# Altium PCB ECE315-S26.PcbDoc
Units mm, origin at the board's own origin, x right, y up, seen from the top; angles counter-clockwise.
Board outline 95 x 95 mm, 2 copper layers (Top Layer, Bottom Layer); 47 components, 34 nets, 155 pads, 112 vias.
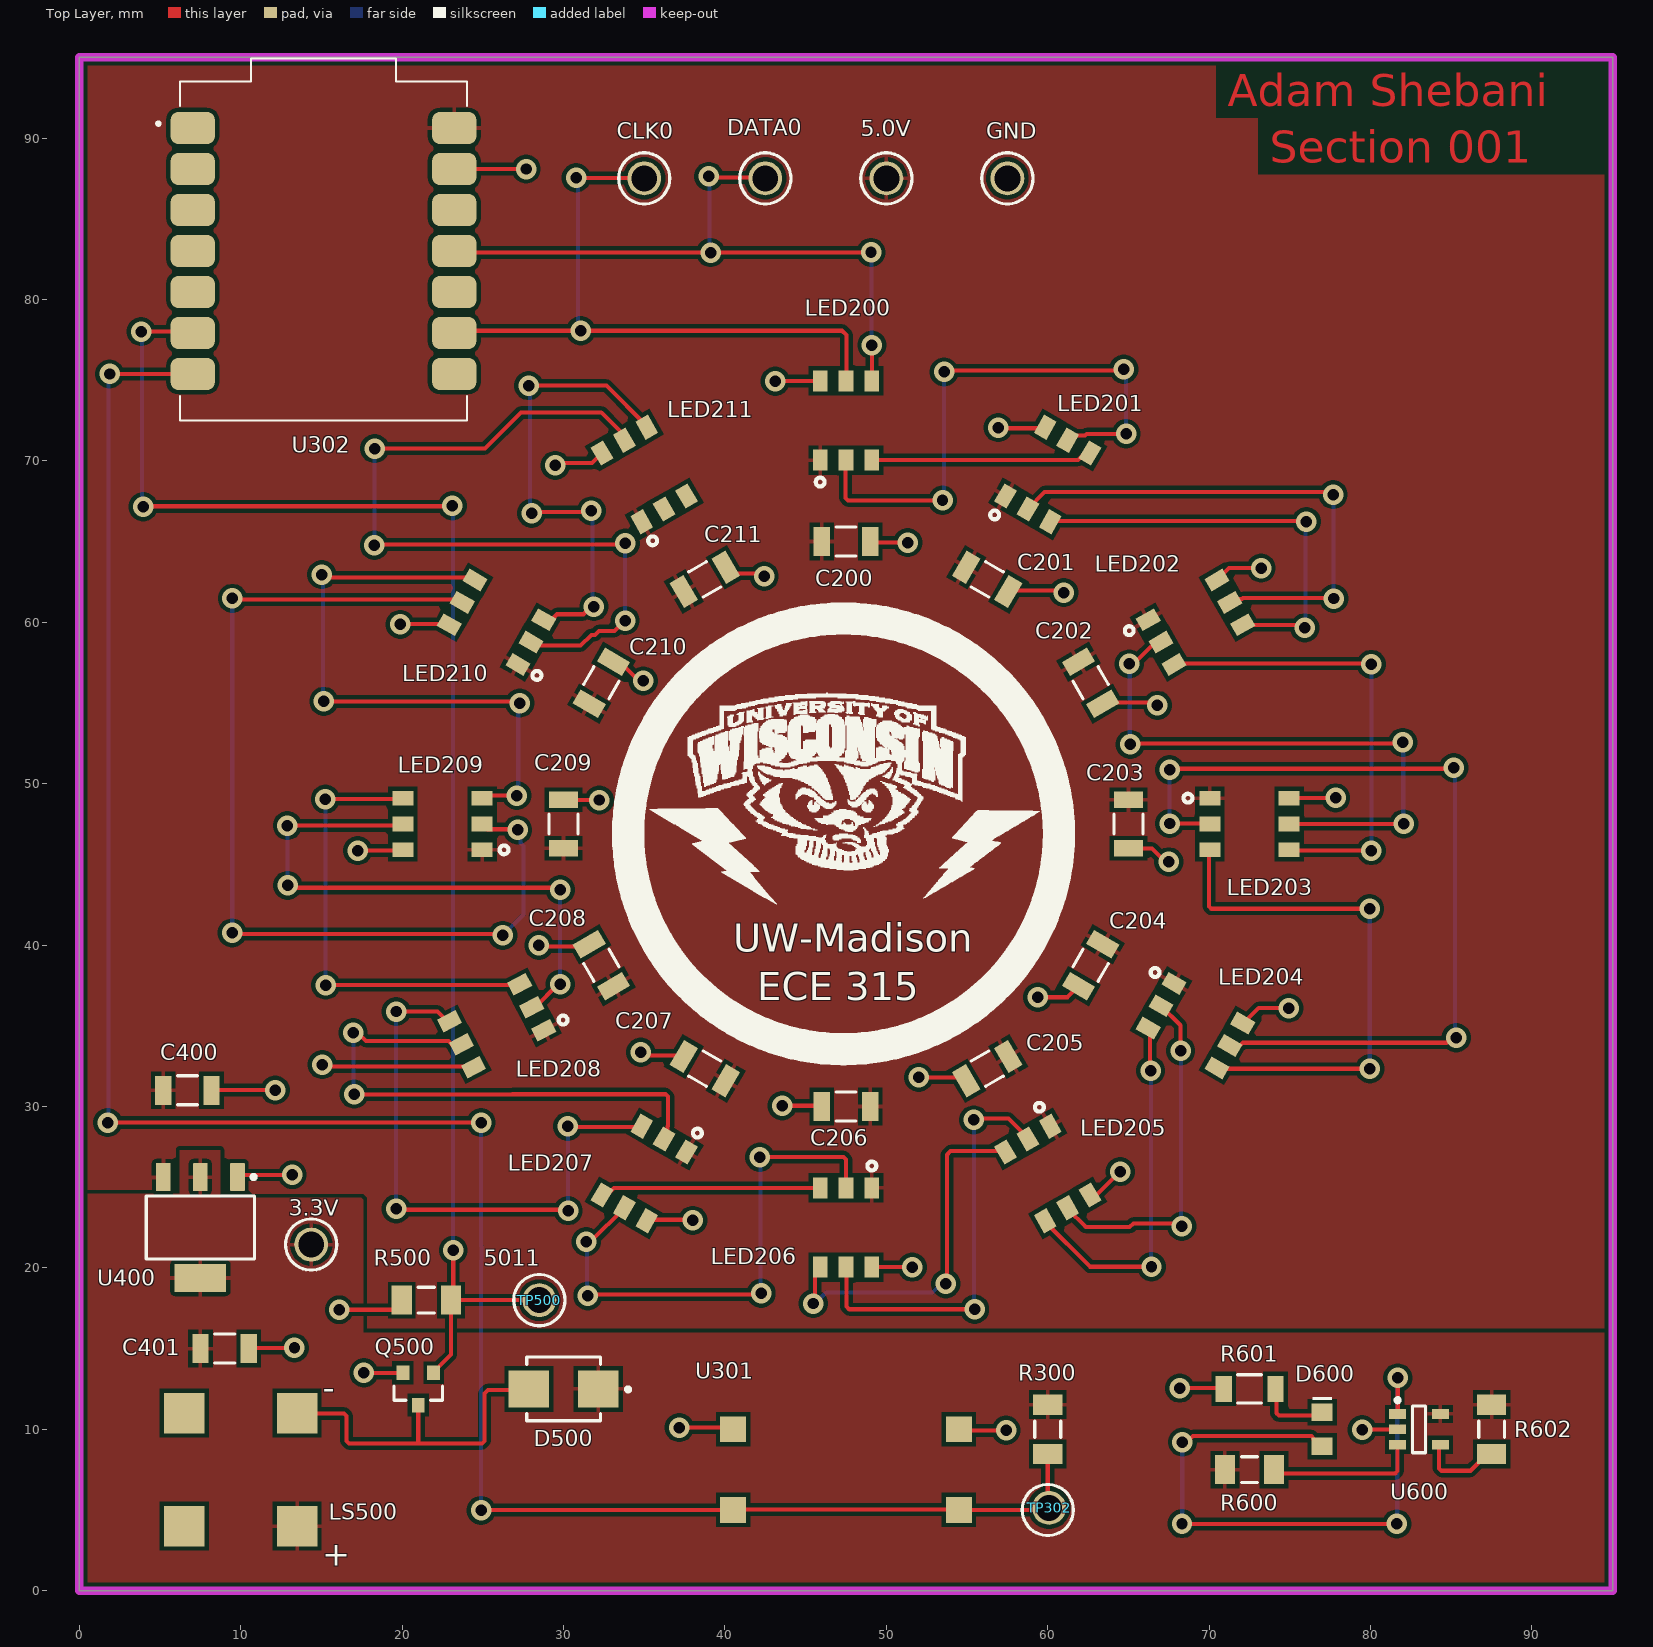
[diagram p0: Top Layer view]
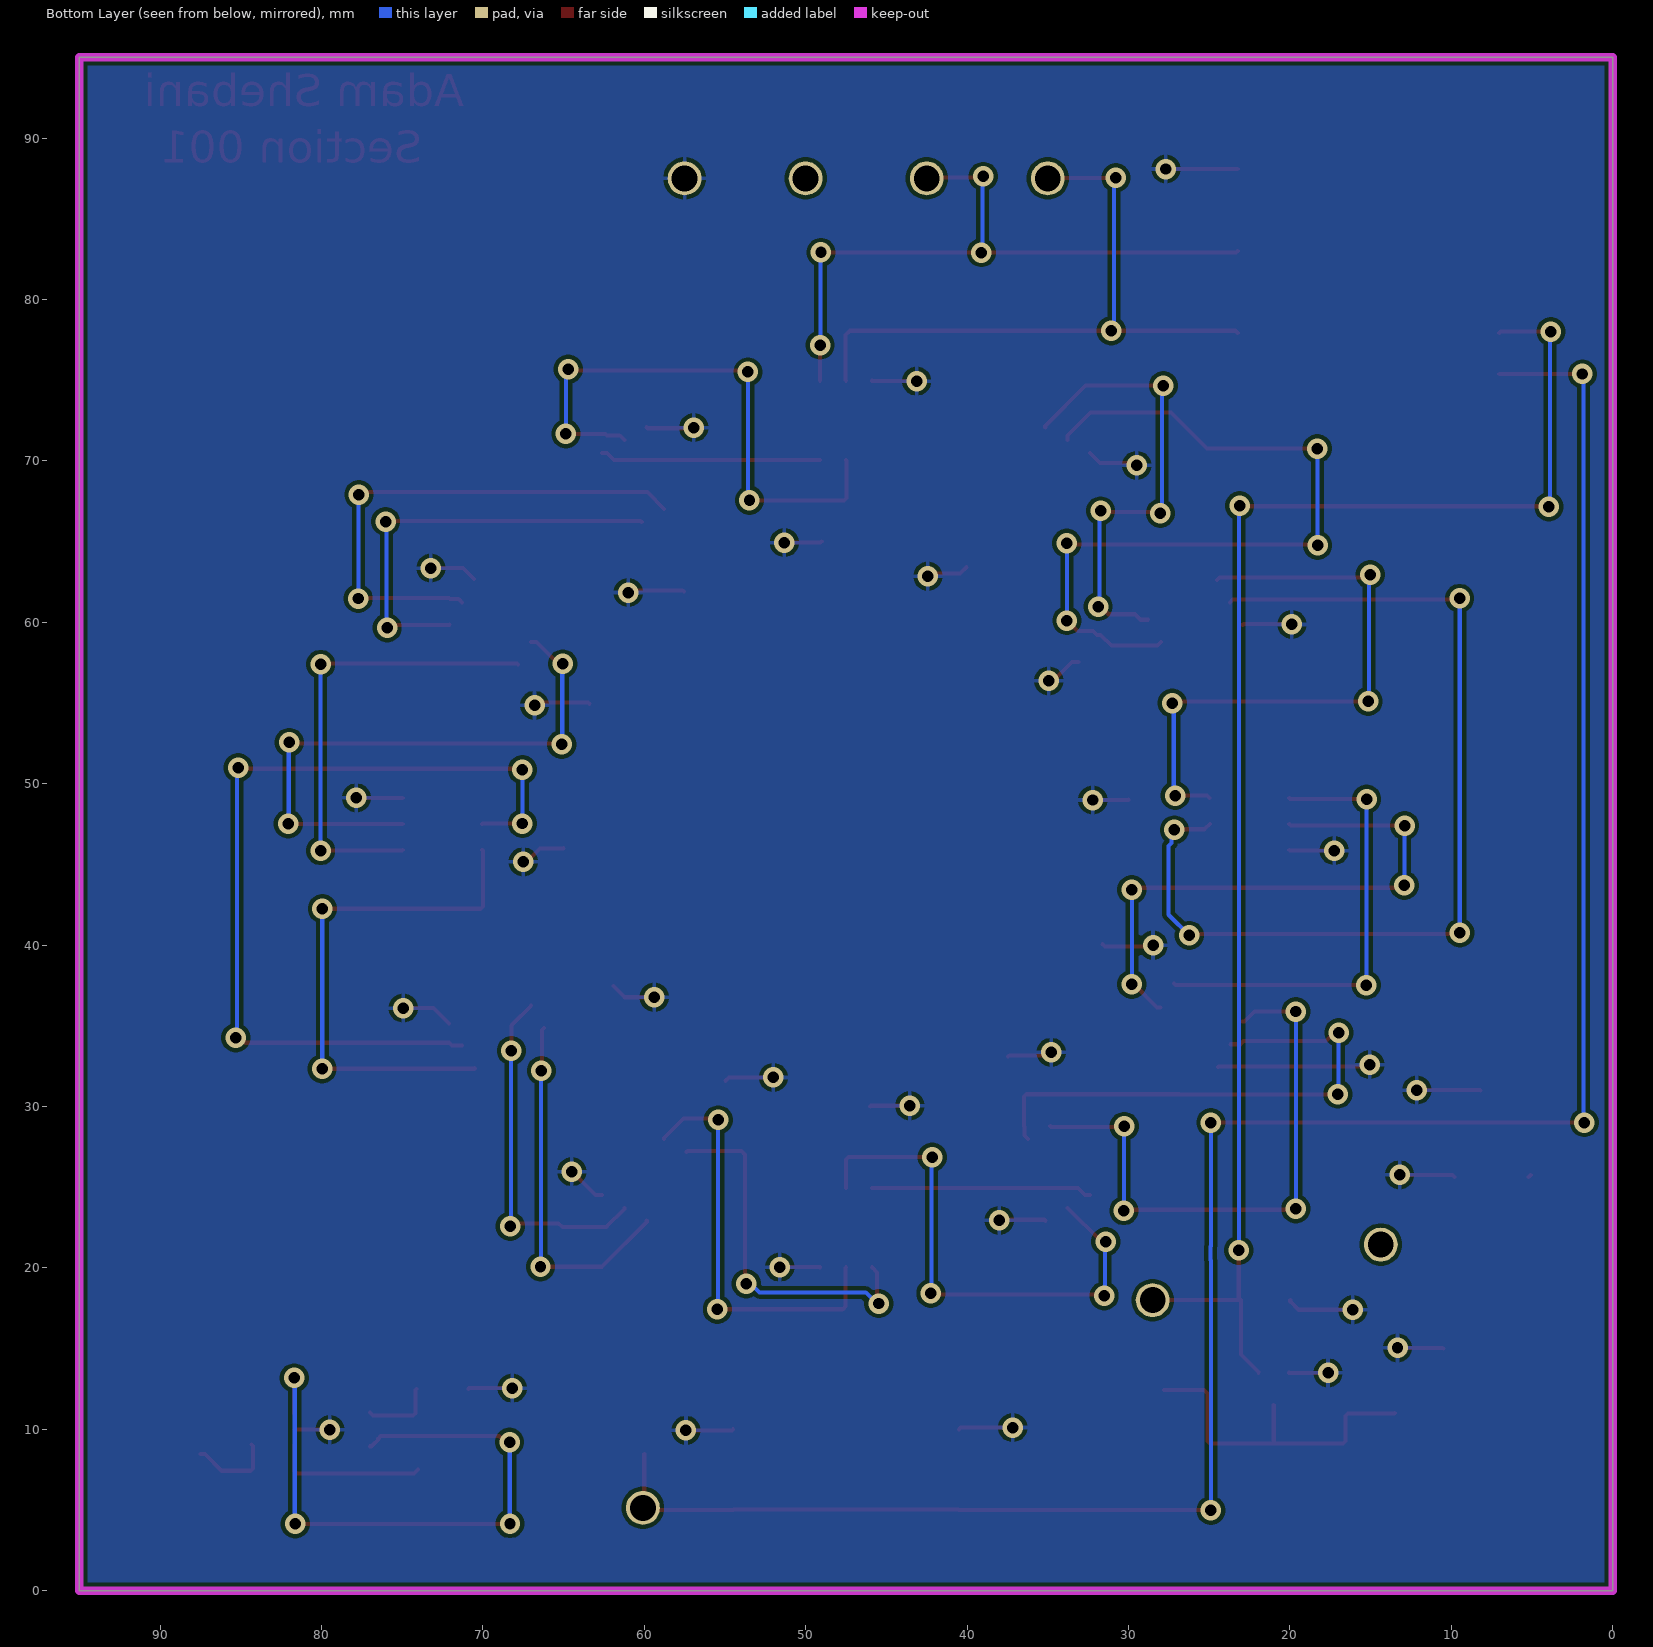
[diagram p1: Bottom Layer view, seen from below]
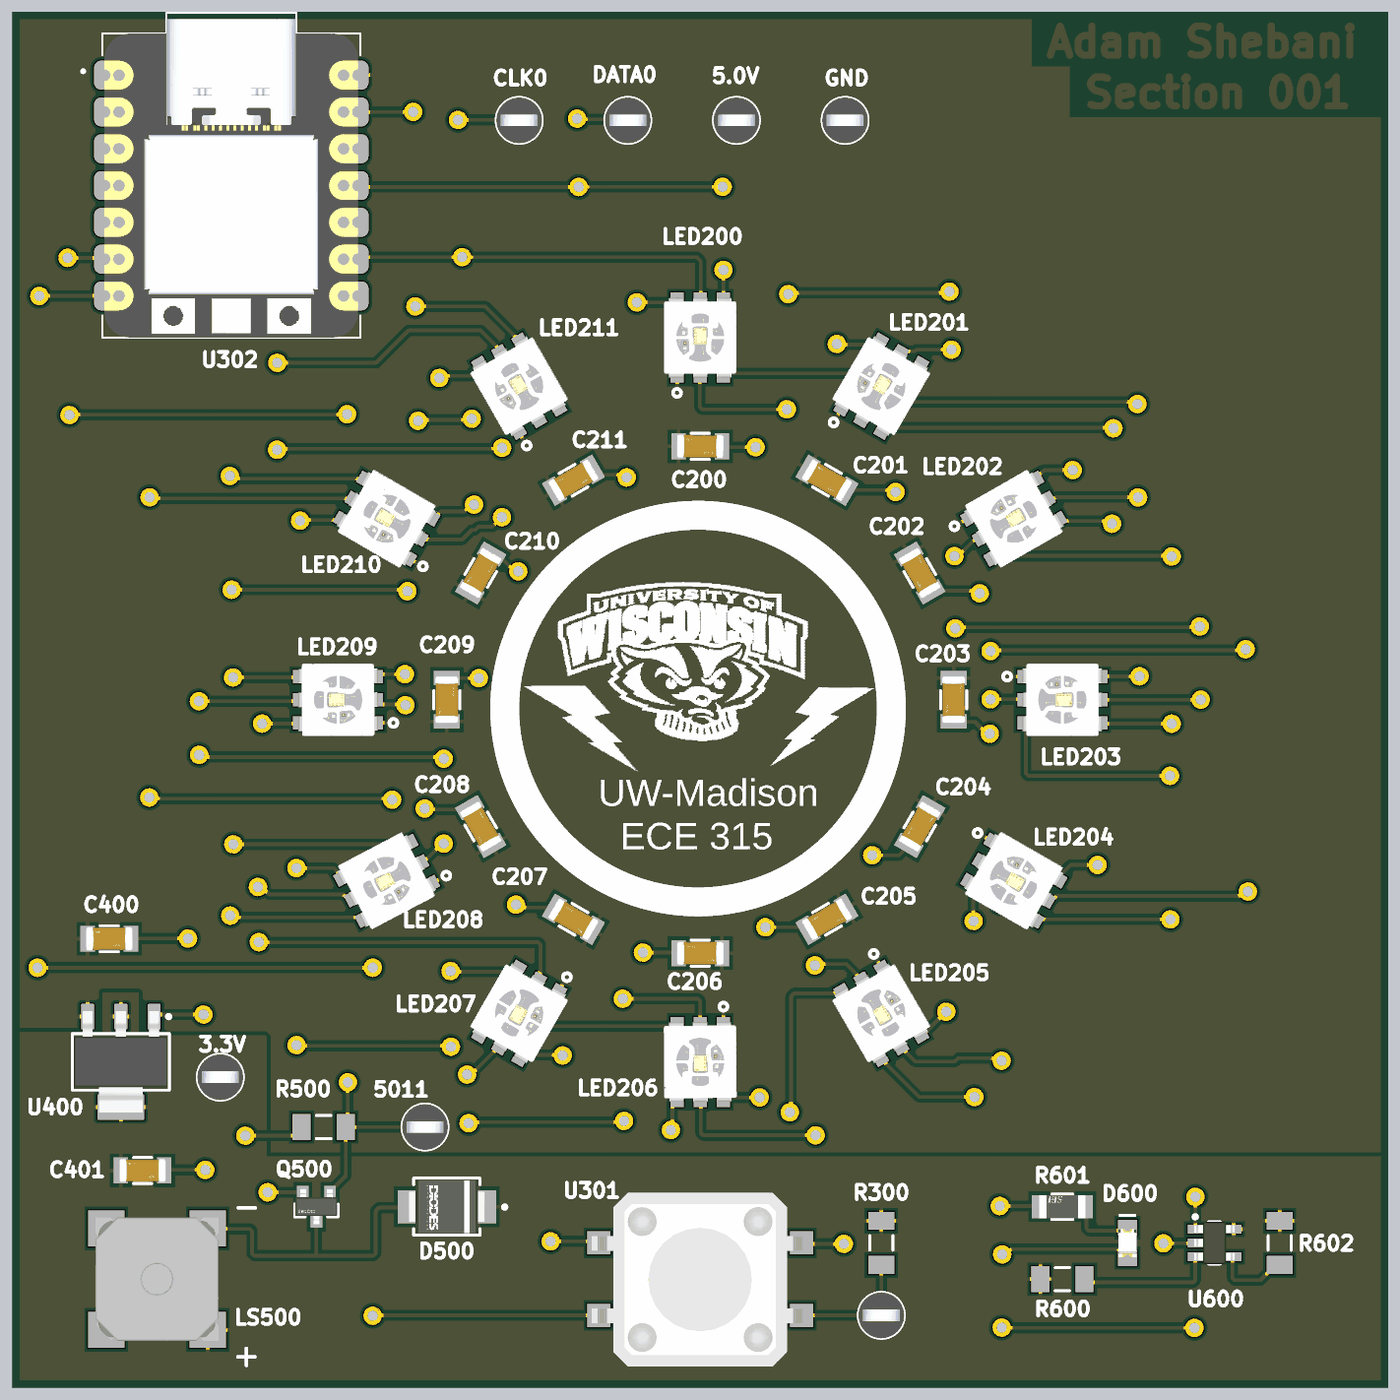
[diagram p2: 3D render of the assembled board from above, using the file's embedded part models]

## Layer stack, top to bottom
Top Solder: solder mask 0.0102, Solder Resist, Dk 3.5
Top Layer: signal copper 0.0356
Dielectric 1: dielectric 0.32, FR-4, Dk 4.8
Bottom Layer: signal copper 0.0356
Bottom Solder: solder mask 0.0102, Solder Resist, Dk 3.5

## Board outline
0,0 0,95 95,95 95,0

## Design rules (kind name [scope] priority, off if disabled: settings)
Clearance [All] p1: gap=0.254 ignorepadtopadclearanceinfootprint=FALSE
PolygonConnect [All] p1: connectstyle=Relief reliefconductorwidth=0.254 reliefentries=4 polygonreliefangle="90 Angle" airgapwidth=0.254
RoutingVias [All] p1: holewidth=0.711 width=1.27 viastyle="Through Hole" minholewidth=0.711 minwidth=1.27 maxholewidth=0.711 maxwidth=1.27
SolderMaskExpansion [All] p1: expansion=0.102 istentingtop=FALSE
SupplyNets "Schematic Supply Nets_2" [InNet('3.3V')] p1: voltage=0.000
SupplyNets "Schematic Supply Nets_1" [InNet('5.0V')] p2: voltage=0.000
SupplyNets "Schematic Supply Nets" [InNet('GND')] p3: voltage=0.000
Width [All] p1: maxlimit=0.254 minlimit=0.254 preferedwidth=0.254
30 further rules are at their usual default settings.

## Classes and differential pairs
component class 06_Reset: D600 R600 R601 R602 U600
component class 05_Buzzer: D500 LS500 Q500 R500 TP500

## Components (designator, comment, footprint, x,y, rotation, side; value= is the part's Value field where it differs from the comment)
3.3V "5011" KSTN-5011_V#1 14.366,21.443 r0 top (schematic designator TP401)
5.0V "5011" KSTN-5011_V#1 50,87.5 r0 top (schematic designator TP400)
C200 "CC1206KRX7R8BB104" FP-CC1206-1_25-MFG 47.5,65 r0 top value="100 nF"
C201 "CC1206KRX7R8BB104" FP-CC1206-1_25-MFG 56.25,62.655 r330 top value="100 nF"
C202 "CC1206KRX7R8BB104" FP-CC1206-1_25-MFG 62.655,56.25 r300 top value="100 nF"
C203 "CC1206KRX7R8BB104" FP-CC1206-1_25-MFG 65,47.5 r270 top value="100 nF"
C204 "CC1206KRX7R8BB104" FP-CC1206-1_25-MFG 62.655,38.75 r240 top value="100 nF"
C205 "CC1206KRX7R8BB104" FP-CC1206-1_25-MFG 56.25,32.345 r210 top value="100 nF"
C206 "CC1206KRX7R8BB104" FP-CC1206-1_25-MFG 47.5,30 r180 top value="100 nF"
C207 "CC1206KRX7R8BB104" FP-CC1206-1_25-MFG 38.75,32.345 r150 top value="100 nF"
C208 "CC1206KRX7R8BB104" FP-CC1206-1_25-MFG 32.345,38.75 r120 top value="100 nF"
C209 "CC1206KRX7R8BB104" FP-CC1206-1_25-MFG 30,47.5 r90 top value="100 nF"
C210 "CC1206KRX7R8BB104" FP-CC1206-1_25-MFG 32.345,56.25 r60 top value="100 nF"
C211 "CC1206KRX7R8BB104" FP-CC1206-1_25-MFG 38.75,62.655 r30 top value="100 nF"
C400 "CC1206KRX7R8BB104" FP-CC1206-1_25-MFG 6.7,31 r0 top value="100 nF"
C401 "CC1206KRX7R8BB104" FP-CC1206-1_25-MFG 9,15 r0 top value="100 nF"
CLK0 "5011" KSTN-5011_V#1 35,87.5 r0 top (schematic designator TP301)
D500 "B340LB-13-F" FP-SMB-MFG 30,12.5 r180 top value=180pF
D600 "150080GS75000" WL-SMCW_0805_150080xx75000 77,10 r270 top
DATA0 "5011" KSTN-5011_V#1 42.5,87.5 r0 top (schematic designator TP300)
GND "5011" KSTN-5011_V#1 57.5,87.5 r0 top (schematic designator TP402)
LED200 "IC_Serial_LED" IC_Serial_LED 47.5,72.5 r0 top
LED201 "IC_Serial_LED" IC_Serial_LED 60,69.151 r330 top
LED202 "IC_Serial_LED" IC_Serial_LED 69.151,60 r300 top
LED203 "IC_Serial_LED" IC_Serial_LED 72.5,47.5 r270 top
LED204 "IC_Serial_LED" IC_Serial_LED 69.151,35.009 r240.02 top
LED205 "IC_Serial_LED" IC_Serial_LED 60,25.849 r210 top
LED206 "IC_Serial_LED" IC_Serial_LED 47.5,22.5 r180 top
LED207 "IC_Serial_LED" IC_Serial_LED 35,25.849 r150 top
LED208 "IC_Serial_LED" IC_Serial_LED 25.849,35 r117.7 top
LED209 "IC_Serial_LED" IC_Serial_LED 22.5,47.5 r90 top
LED210 "IC_Serial_LED" IC_Serial_LED 25.849,60 r60 top
LED211 "IC_Serial_LED" IC_Serial_LED 35,69.151 r30 top
LS500 "CMT-8540S-SMT" MBT_Footprint 10,7.5 r0 top
Q500 "2N7002-7-F" FP-SOT23-MFG 21,12.5 r270 top
R300 "RC1206FR-0710KL" RESC3116X65X40ML10T20 60,10 r90 top
R500 "RC1206FR-0710KL" RESC3116X65X40ML10T20 21.5,18 r0 top
R600 "RC1206FR-0710KL" RESC3116X65X40ML10T20 72.5,7.5 r180 top
R601 "RMCF1206JT330R" FP-RMCF1206-MFG 72.5,12.5 r180 top value=330R
R602 "RC1206FR-0710KL" RESC3116X65X40ML10T20 87.5,10 r90 top
TP302 "5011" KSTN-5011_V#2 60,5 r0 top
TP500 "5011" KSTN-5011_V#1 28.5,18 r0 top
U301 "TL3300DF160Q" TL3300DF160Q 47.5,7.5 r0 top
U302 "Bucky" WalkingBucky 47.5,47.5 r0 top
U302 "IC-RP2350" XIAO-RP2350 15,83 r0 top (schematic designator U300)
U400 "TLV1117LV33DCYR" DCY0004A_N 7.5,22.5 r270 top
U600 "MCP1316-29LE/OT" SOT23-5-MCP-1316T 83,10 r0 top

## Footprints (in the part's own frame and the unit in brackets; to place one, negate y for a bottom-side part, rotate by r counter-clockwise, add the part's x,y. Pads: shape width x height; smd on the part's side, far side on the other; paste and mask are expansions set on the pad)
DCY0004A_N [mm] "SOT223, 4-Leads, Body 6.7x3.7mm, Pitch 2.3mm, IPC Medium Density"
  rrect11% 1.75x0.9 smd: 1(-3.125,2.3) 2(-3.125,0) 3(-3.125,-2.3)
  rrect6% 1.75x3.2 smd: 4(3.125,0)
  silkscreen extent -3.25,-3.35 1.95,3.43, body extent -3.5,-3.25 3.5,3.25, height 1.62
FP-CC1206-1_25-MFG [mm]
  rect 1x1.8 smd paste+0 mask+0: 1(-1.5,0) 2(1.5,0)
  silkscreen extent -0.63,-0.9 0.62,0.9, body extent -2.2,-1.25 2.2,1.25, height 0.25
FP-RMCF1206-MFG [mm]
  rect 1x1.6 smd paste+0 mask+0: 1(-1.6,0) 2(1.6,0)
  silkscreen extent -0.72,-0.87 0.72,0.87, body extent -2.2,-0.97 2.2,0.97, height 0.25
FP-SMB-MFG [mm]
  rect 2.5x2.3 smd paste+0 mask+0: 1(-2.15,0) 2(2.15,0)
  silkscreen extent -4.13,-1.97 2.28,1.97, body extent -3.5,-2.07 3.5,2.07, height 0.25
FP-SOT23-MFG [mm]
  rect 0.9x0.8 smd paste+0 mask+0: 1(-1,0.95) 2(-1,-0.95) 3(1,0)
  silkscreen extent -0.18,-1.5 0.7,1.5, body extent -1.55,-1.6 1.55,1.6, height 0.25
IC_Serial_LED [mm] "T3A33BRG-H9C0002X1U1930"
  rect 0.9x1.3 smd: 1(-1.6,-2.46) 2(0,-2.46) 3(1.6,-2.46) 4(1.6,2.46) 5(0,2.46) 6(-1.6,2.46)
  silkscreen extent -1.87,-4.09 -1.32,-3.54, body extent -2.5,-2.75 2.5,2.75, height 1.4
KSTN-5011_V#1 [mm] "Test Point, Dia 3.17mm"
  round 2.1 hole 1.6: 1(0,0)
  silkscreen extent -1.59,-1.58 1.59,1.58, body extent -1.59,-1.59 1.59,1.59, height 8.13
KSTN-5011_V#2 [mm] "Test Point, Dia 3.17mm"
  round 2.1 hole 1.6: 1(0.083,0.133)
  silkscreen extent -1.59,-1.58 1.59,1.58, body extent -1.59,-1.59 1.59,1.59, height 8.13
MBT_Footprint [mm] "CMT-8540S-SMT-TR"
  rect 2.5x2.5 smd: M1(-3.5,3.5) M2(-3.5,-3.5) N(3.5,3.5) P(3.5,-3.5)
  body extent -4.26,-4.25 4.24,4.25, height 4
RESC3116X65X40ML10T20 [mm] "Chip Resistor, 2-Leads, Body 3.10x1.60mm, IPC Low Density"
  rect 1.25x1.8 smd: 1(-1.525,0) 2(1.525,0)
  silkscreen extent -0.5,-0.8 0.5,0.8, body extent -1.6,-0.85 1.6,0.85, height 0.65
SOT23-5-MCP-1316T [mm] "MCP1316T, SOT23, 5-Leads"
  rect 1.05x0.6 smd: 1(-1.325,0.95) 2(-1.325,0) 3(-1.325,-0.95) 4(1.325,-0.95) 5(1.325,0.95)
  silkscreen extent -1.45,-1.45 0.4,1.92, body extent -1.4,-1.45 1.4,1.45, height 1.45
TL3300DF160Q [mm] "SWITCH TACTILE SPST-NO 0.05A 12V"
  rect 1.6x1.6 smd: 1(-7,2.5) 2(7,2.5) 3(-7,-2.5) 4(7,-2.5)
  body extent -7.51,-6.03 7.49,5.97, height 4.3
WalkingBucky [mm]
  silkscreen extent -13.5,-13.96 13.19,12.74
WL-SMCW_0805_150080xx75000 [mm] "SMD Mono-color Chip LED, body 2.0x1.25mm"
  rect 1.1x1.3 smd: 1(-1.05,0) 2(1.05,0)
  silkscreen extent -2,-0.6 -1.8,0.6, body extent -1,-0.63 1,0.62, height 0.7
XIAO-RP2350 [mm] "SeeedStudio RPI 2350"
  rrect50% 2.75x2 smd: 1(-7.973,7.62) 2(-7.973,5.08) 3(-7.973,2.54) 4(-7.973,0) 5(-7.973,-2.54) 6(-7.973,-5.08) 7(-7.973,-7.62) 8(8.227,-7.62) 9(8.227,-5.08) 10(8.227,-2.54) 11(8.227,0) 12(8.227,2.54) 13(8.227,5.08) 14(8.227,7.62)
  silkscreen extent -10.2,-10.5 9.03,11.92, body extent -8.62,-10.5 8.88,11.5, height 4.41

## Part data
3.3V 5.0V CLK0 DATA0 GND TP302 TP500: library part CMP-1672-00003-4, "Test Point, Black, Through Hole, RoHS, Bulk", Colour=Black, Manufacturer=Keystone, Package Quantity=100, ComponentLink1Description="Manufacturer URL", ComponentLink1URL=http://www.keyelco.com/, ComponentLink2Description=Datasheet, ComponentLink2URL=http://www.keyelco.com/product-pdf.cfm?p=1320, Contact Material=Bronze, Contact Plating=Silver, DatasheetVersion="Rev. F, 12/2013", Height="8.12 mm", Mount="Through Hole", Mounting Technology="Through Hole", PackageDescription="1-Pin Through Hole Device, Dia 3.17 mm", PackageReference=5011, Packaging=Bulk, Pins=1, REACH SVHC="No SVHC", RoHSCompliant=true
C200 C201 C202 C203 C204 C205 C206 C207 C208 C209 C210 C211 C400 C401: library part CMP-1037-04191-3, "CAP CER 0.1UF 25V X7R 1206", Capacitance="100 nF", Manufacturer=Yageo, Package=CC1206-1.25, Temperature="-55°C to +125°C", Temperature Characteristic=X7R, Temperature Coefficient=15%, Temperature Range High=+125°C, Temperature Range Low=-55°C, Tolerance=0.1, Voltage Rating="25 V", Automotive=No, Automotive Grade=NA, Category=Cap, ComponentLink2Description=Datasheet, ComponentLink2URL=http://www.yageo.com/documents/recent/UPY-NP0X7R_HV_1KV-to-3KV_11.pdf, Device Class L1="Passive Components", Device Class L2=Capacitors, Device Class L3="Ceramic Capacitors", Digikey Description="CAP CER 0.1UF 25V X7R 1206", Footprint Url=http://www.yageo.com/exep/pages/download/literatures/UPY-C_GEN_24.pdf, Height=1.45mm, Lead Free=Yes, Manufacturer Part Number=CC1206KRX7R8BB104, Material=Ceramic, Mouser Description="Multilayer Ceramic Capacitors MLCC - SMD/SMT 100nF 25V X7R 10%", Octopart=https://octopart.com/cc1206krx7r8bb104-yageo-42334534, RoHS=TRUE
D500: library part CMP-12790-000022-1, "DIODE SCHOTTKY 40V 3A SMB", Capacitance=180pF, Forward Current=3A, Manufacturer="Diodes Inc.", Max Junction Temp=+150°C, Max Repetitive Reverse Voltage=40V, Max Surge Forward Current=70A, Package=SMB, Peak Reverse Current=2mA, Temperature="-55°C to +150°C", Temperature Range Low=-55°C, Automotive=No, Category=Diode, ComponentLink2Description=Datasheet, ComponentLink2URL=https://www.diodes.com/assets/Datasheets/ds30240.pdf, Device Class L1="Discrete Semiconductors", Device Class L2=Diodes, Device Class L3="Schottky Diodes", Digikey Description="DIODE SCHOTTKY 40V 3A SMB", Footprint Url=https://www.diodes.com/assets/Package-Files/SMB.pdf, Height=2.5mm, Lead Free=Yes, Manufacturer Part Number=B340LB-13-F, Mouser Description="Schottky Diodes & Rectifiers 40V 3A", Octopart=https://octopart.com/b340lb-13-f-diodes+inc.-325823, Reverse Voltage=40V, RoHS=TRUE, Standoff Height=0.05mm, Temperature Range High=+150°C
D600: library part CMP-1426-00007-3, "WURTH ELEKTRONIK - 150080GS75000 - LED, Green, SMD, 0805, 30 mA, 3.2 V, 520 nm", Case Code (Imperial)=0805, Case Code (Metric)=2012, Color=Green, Forward Current=100mA, Forward Voltage=3.2V, Max Junction Temperature (Tj)=95°C, Max Operating Temperature=85°C, Max Reverse Voltage (DC)=5V, Min Operating Temperature=-40°C, Power Dissipation=105mW, Test Current=20mA, Case/Package=0805, Dominant Wavelength=525nm, Height=700µm, Length=2mm, Lens Style="Clear, Rectangular", Luminous Intensity=450mcd, Mount="Surface Mount", Packaging="Tape and Reel", Peak Wavelength=515nm, REACH SVHC=Unknown, Reverse Voltage=5V, RoHS=Compliant, Viewing Angle=140°, Wavelength=525nm, Width=1.25mm
LED200 LED201 LED202 LED203 LED204 LED205 LED206 LED207 LED208 LED209 LED210 LED211: Manufacturer=Harvatek, Manufacturer Part Number=T3A33BRG-H9C0002X1U1930, Supplier Part Number=3147-T3A33BRG-H9C0002X1U1930CT-ND, Category=Optoelectronics, Drawn By="Adam Shebani", Pricing="1=0.25, 1000=0.23807 (USD)", Stock=6384, Supplier=DigiKey
LS500: "8.5 mm, 5.0 Vo-p, 100 dB, Surface Mount (SMT), Magnetic Audio Transducer Buzzer", Frequency=4kHz, Manufacturer="Same Sky", Manufacturer 1=CUI, Manufacturer Part Number=CMT-8540S-SMT-TR, Max Operating Temperature=70°C, Min Operating Temperature=-20°C, Operating Supply Current=150mA, Package="CUI Inc.", Supplier Part Number 1=102-3746-1-ND, Voltage Rating=5V, Availability=Unavailable, Category="Audio Products", ComponentLink1Description=https://www.cui.com/product/resource/digikeypdf/cmt-8540s-smt.pdf?src-supplier=Digi-Key, ComponentLink1URL=https://www.cui.com/product/resource/digikeypdf/cmt-8540s-smt.pdf?src-supplier=Digi-Key, ComponentLink2Description=https://datasheet.octopart.com:443/CMT-8540S-SMT-TR-Same-Sky-datasheet-188822742.pdf?src-supplier=Same+Sky, ComponentLink2URL=https://datasheet.octopart.com:443/CMT-8540S-SMT-TR-Same-Sky-datasheet-188822742.pdf?src-supplier=Same+Sky, ComponentLink3Description=https://datasheet.octopart.com:443/CMT-8540S-SMT-TR-Same-Sky-datasheet-181915218.pdf?src-supplier=Same+Sky, ComponentLink3URL=https://datasheet.octopart.com:443/CMT-8540S-SMT-TR-Same-Sky-datasheet-181915218.pdf?src-supplier=Same+Sky, ComponentLink4Description=https://datasheet.octopart.com:443/CMT-8540S-SMT-TR-Same-Sky-datasheet-181915214.pdf?src-supplier=Same+Sky, ComponentLink4URL=https://datasheet.octopart.com:443/CMT-8540S-SMT-TR-Same-Sky-datasheet-181915214.pdf?src-supplier=Same+Sky, ComponentLink5Description=https://datasheet.octopart.com:443/CMT-8540S-SMT-TR-CUI-Devices-datasheet-175924062.pdf?src-supplier=Same+Sky, ComponentLink5URL=https://datasheet.octopart.com:443/CMT-8540S-SMT-TR-CUI-Devices-datasheet-175924062.pdf?src-supplier=Same+Sky, ComponentLink6Description=https://datasheet.octopart.com:443/CMT-8540S-SMT-TR-CUI-Devices-datasheet-137938348.pdf?src-supplier=Same+Sky, ComponentLink6URL=https://datasheet.octopart.com:443/CMT-8540S-SMT-TR-CUI-Devices-datasheet-137938348.pdf?src-supplier=Same+Sky, ComponentLink7Description=https://datasheet.octopart.com:443/CMT-8540S-SMT-TR-Same-Sky-datasheet-190141872.pdf?src-supplier=element14+APAC, ComponentLink7URL=https://datasheet.octopart.com:443/CMT-8540S-SMT-TR-Same-Sky-datasheet-190141872.pdf?src-supplier=element14+APAC, ComponentLink8Description=https://datasheet.octopart.com:443/CMT-8540S-SMT-TR-Same-Sky-datasheet-182879942.pdf?src-supplier=Electro+Sonic, ComponentLink8URL=https://datasheet.octopart.com:443/CMT-8540S-SMT-TR-Same-Sky-datasheet-182879942.pdf?src-supplier=Electro+Sonic, ComponentLink9Description=https://datasheet.octopart.com:443/CMT-8540S-SMT-TR-CUI-Devices-datasheet-175925417.pdf?src-supplier=Master+Electronics, ComponentLink9URL=https://datasheet.octopart.com:443/CMT-8540S-SMT-TR-CUI-Devices-datasheet-175925417.pdf?src-supplier=Master+Electronics, ComponentLink10Description=https://datasheet.octopart.com:443/CMT-8540S-SMT-TR-CUI-Devices-datasheet-140999905.pdf?src-supplier=Master+Electronics, ComponentLink10URL=https://datasheet.octopart.com:443/CMT-8540S-SMT-TR-CUI-Devices-datasheet-140999905.pdf?src-supplier=Master+Electronics, ComponentLink11Description=https://datasheet.octopart.com:443/CMT-8540S-SMT-TR-CUI-Devices-datasheet-103106163.pdf?src-supplier=Master+Electronics, ComponentLink11URL=https://datasheet.octopart.com:443/CMT-8540S-SMT-TR-CUI-Devices-datasheet-103106163.pdf?src-supplier=Master+Electronics, ComponentLink12Description=https://datasheet.octopart.com:443/CMT-8540S-SMT-TR-Same-Sky-datasheet-189104627.pdf?src-supplier=Master+Electronics, ComponentLink12URL=https://datasheet.octopart.com:443/CMT-8540S-SMT-TR-Same-Sky-datasheet-189104627.pdf?src-supplier=Master+Electronics, ComponentLink13Description=https://datasheet.octopart.com:443/CMT-8540S-SMT-TR-Same-Sky-datasheet-188930427.pdf?src-supplier=TME, ComponentLink13URL=https://datasheet.octopart.com:443/CMT-8540S-SMT-TR-Same-Sky-datasheet-188930427.pdf?src-supplier=TME, ComponentLink14Description=https://datasheet.octopart.com:443/CMT-8540S-SMT-TR-Same-Sky-datasheet-182049229.pdf?src-supplier=Future+Electronics, ComponentLink14URL=https://datasheet.octopart.com:443/CMT-8540S-SMT-TR-Same-Sky-datasheet-182049229.pdf?src-supplier=Future+Electronics, ComponentLink15Description=https://datasheet.octopart.com:443/CMT-8540S-SMT-TR-Same-Sky-datasheet-182049228.pdf?src-supplier=Future+Electronics, ComponentLink15URL=https://datasheet.octopart.com:443/CMT-8540S-SMT-TR-Same-Sky-datasheet-182049228.pdf?src-supplier=Future+Electronics, ComponentLink16Description=https://datasheet.octopart.com:443/CMT-8540S-SMT-TR-CUI-Devices-datasheet-175925194.pdf?src-supplier=Future+Electronics, ComponentLink16URL=https://datasheet.octopart.com:443/CMT-8540S-SMT-TR-CUI-Devices-datasheet-175925194.pdf?src-supplier=Future+Electronics, ComponentLink17Description=https://datasheet.octopart.com:443/CMT-8540S-SMT-TR-CUI-Devices-datasheet-140151070.pdf?src-supplier=Future+Electronics, ComponentLink17URL=https://datasheet.octopart.com:443/CMT-8540S-SMT-TR-CUI-Devices-datasheet-140151070.pdf?src-supplier=Future+Electronics, ComponentLink18Description=https://datasheet.octopart.com:443/CMT-8540S-SMT-TR-CUI-Devices-datasheet-175927021.pdf?src-supplier=CUI+Devices+SCT, ComponentLink18URL=https://datasheet.octopart.com:443/CMT-8540S-SMT-TR-CUI-Devices-datasheet-175927021.pdf?src-supplier=CUI+Devices+SCT, ComponentLink19Description=https://datasheet.octopart.com:443/CMT-8540S-SMT-TR-CUI-Devices-datasheet-142348426.pdf?src-supplier=CUI+Devices+SCT, ComponentLink19URL=https://datasheet.octopart.com:443/CMT-8540S-SMT-TR-CUI-Devices-datasheet-142348426.pdf?src-supplier=CUI+Devices+SCT, ComponentLink20Description=https://octopart.com:443/opatz8j6/c1?t=TuT2gNTvJpo_yjRnM7QIcRzfg0x1-xTdTyMxfU2-5t4z1ejkL6PA1jFKuNqkdiWiOSfYO0vvO0p54e5XAzOGaIkHIsr3g49qCyNRee37EbRG1p9GKsoah39OF1Zg1Gz80EG9si1XHmQLLgfWC7KzbsDGlBJlvkgTN80b8dPLQ7E9fPeQcRihUXtqo6YVC6aSoOINB7uzJYK7KUtQWgQHggeFszqcpBhw_xhLRBzDe0ylBNZbwCYqW8v_3NKedSS7Ugfwipe_r_SjQ3v1SR6kXRfBRwb0jh4N92QYN61JqD8Wo72O_FSYd5wFfEYnsPzRXRQyBv1kK3Qx3F7On0xgA1bExSrMbyngCl6rA6Cd&src-supplier=Compliance+Statements, ComponentLink20URL=https://octopart.com:443/opatz8j6/c1?t=TuT2gNTvJpo_yjRnM7QIcRzfg0x1-xTdTyMxfU2-5t4z1ejkL6PA1jFKuNqkdiWiOSfYO0vvO0p54e5XAzOGaIkHIsr3g49qCyNRee37EbRG1p9GKsoah39OF1Zg1Gz80EG9si1XHmQLLgfWC7KzbsDGlBJlvkgTN80b8dPLQ7E9fPeQcRihUXtqo6YVC6aSoOINB7uzJYK7KUtQWgQHggeFszqcpBhw_xhLRBzDe0ylBNZbwCYqW8v_3NKedSS7Ugfwipe_r_SjQ3v1SR6kXRfBRwb0jh4N92QYN61JqD8Wo72O_FSYd5wFfEYnsPzRXRQyBv1kK3Qx3F7On0xgA1bExSrMbyngCl6rA6Cd&src-supplier=Compliance+Statements, ComponentLink21Description=https://octopart.com:443/opatz8j6/c1?t=-w2GoCGQpX4zH2qqt0saqmHF_L2_DJiGJF7AFhdkCk0of-bBcod6T4e_wMdNFwF9tICQRDHBfFEP40JnSh0Ri07gsxTicdoOoQz72w8GHct0sqzxfM9YQ3Ug51fLvc4kpuPXdMJ0lwmmk9g15m3x2rlZXgLpMv25LjTSABL_eYeIFkP--HwPJdHCd4-wvcMMp6cb9lXUq4snrgAEj0Qlf_BK11yy0ExZRztJ5zp5dWebC9gTTPK_Rg_T_Anvyc5OCFxkZP-K8u9fJlPENjcnnWDJ9iY8WcGw0K5sPdYCCUF5QTzXTDnbAkmkb4wzHnWBN85LYTbhtBU1nNVeaP-50RGfX6aIzQ9u2MQT-jDD68Qoug&src-supplier=Compliance+Statements, ComponentLink21URL=https://octopart.com:443/opatz8j6/c1?t=-w2GoCGQpX4zH2qqt0saqmHF_L2_DJiGJF7AFhdkCk0of-bBcod6T4e_wMdNFwF9tICQRDHBfFEP40JnSh0Ri07gsxTicdoOoQz72w8GHct0sqzxfM9YQ3Ug51fLvc4kpuPXdMJ0lwmmk9g15m3x2rlZXgLpMv25LjTSABL_eYeIFkP--HwPJdHCd4-wvcMMp6cb9lXUq4snrgAEj0Qlf_BK11yy0ExZRztJ5zp5dWebC9gTTPK_Rg_T_Anvyc5OCFxkZP-K8u9fJlPENjcnnWDJ9iY8WcGw0K5sPdYCCUF5QTzXTDnbAkmkb4wzHnWBN85LYTbhtBU1nNVeaP-50RGfX6aIzQ9u2MQT-jDD68Qoug&src-supplier=Compliance+Statements, ComponentLink22Description=https://octopart.com:443/opatz8j6/c1?t=DEWJqFhwOSyz_H_REwP9Bf9k-3EkrBXOKtSkjdVkTfQU1-mf8AWbHkGBULwp25c-NbAyZU-d0TOv6aszi-MUttCIYvgOHTczM6OFcH4MT9qHT2EqOHlquyItlLDf08J4rerxoXxwr0TE9QwJbp7kCW8gnIIUvyTQxepN1y8IMW5MP7bhlVkDpt1lOU0K_T8KZ9vKib7VLF1QPBAKGj9ypEcsVqoJUzH46ypG_1kCbAWQxkw9-XDb2CXC4TPpMGUiZX9ecHgV_cRt7HRW6NLn-gmtIJho1C_quWR4T8rckwRYECWGJwTOrudE6RhTXkK1MoqcNtnDLVAdtliNv-h_NT8EekiHfha84-2u-1TD&src-supplier=Compliance+Statements, ComponentLink22URL=https://octopart.com:443/opatz8j6/c1?t=DEWJqFhwOSyz_H_REwP9Bf9k-3EkrBXOKtSkjdVkTfQU1-mf8AWbHkGBULwp25c-NbAyZU-d0TOv6aszi-MUttCIYvgOHTczM6OFcH4MT9qHT2EqOHlquyItlLDf08J4rerxoXxwr0TE9QwJbp7kCW8gnIIUvyTQxepN1y8IMW5MP7bhlVkDpt1lOU0K_T8KZ9vKib7VLF1QPBAKGj9ypEcsVqoJUzH46ypG_1kCbAWQxkw9-XDb2CXC4TPpMGUiZX9ecHgV_cRt7HRW6NLn-gmtIJho1C_quWR4T8rckwRYECWGJwTOrudE6RhTXkK1MoqcNtnDLVAdtliNv-h_NT8EekiHfha84-2u-1TD&src-supplier=Compliance+Statements, ComponentLink23Description=https://octopart.com:443/opatz8j6/c1?t=jWCcU9-kFvbqzH7FA-b8yXQjiAGXcLHMJjku6gw5uolZ388ccMPCd6GO8T7yBdQbJtnCxUYWYjKk6Ufrer_ouEO94Jgx_Izrf5pjDZKgNYEhSmgTnSq9qNsQIZge04OF9OH_pve9O2fLPRIBTKND58KOOTHIUJZETXzsoz4p01ckKyWbhmuYuyEMvH-ZsQdT6wmFz68X4n953Hj-dxnuNxPNndWVNeJ4RO_12vXgbQKdO6i4_fFIKx5FCBxXvG6Qa58jm21I1IS9QSUI55erjCPiFbkVB95jYlYDgLBWhemjfd6pv7MaBNbPlgpKUFh0TUl4FHJHgJ9hFAQ87R40yl1z8QuF1NmEg6gya-npbbEkUg&src-supplier=Compliance+Statements, ComponentLink23URL=https://octopart.com:443/opatz8j6/c1?t=jWCcU9-kFvbqzH7FA-b8yXQjiAGXcLHMJjku6gw5uolZ388ccMPCd6GO8T7yBdQbJtnCxUYWYjKk6Ufrer_ouEO94Jgx_Izrf5pjDZKgNYEhSmgTnSq9qNsQIZge04OF9OH_pve9O2fLPRIBTKND58KOOTHIUJZETXzsoz4p01ckKyWbhmuYuyEMvH-ZsQdT6wmFz68X4n953Hj-dxnuNxPNndWVNeJ4RO_12vXgbQKdO6i4_fFIKx5FCBxXvG6Qa58jm21I1IS9QSUI55erjCPiFbkVB95jYlYDgLBWhemjfd6pv7MaBNbPlgpKUFh0TUl4FHJHgJ9hFAQ87R40yl1z8QuF1NmEg6gya-npbbEkUg&src-supplier=Compliance+Statements, CUI_purchase_URL=https://www.cuidevices.com/product/audio/buzzers/audio-transducers/cmt-8540s-smt-tr?utm_source=snapeda.com&utm_medium=referral&utm_campaign=snapedaBOM, Drawn By="Adam Shebani", Height=4mm, Introduction Date=2024-09-06, Lead Free="Lead Free", Length=8.5mm, Lifecycle Status=Production, Manufacturer Part Number 1=CMT-8540S-SMT-TR, MF="CUI Devices", Mounting Technology="Surface Mount", MP=CMT-8540S-SMT-TR, Price=None, Pricing="1000=1.427 (USD)", Pricing 1="1=3.23000, 10=2.67000, 25=2.46400, 50=2.31400, 100=2.16990, 500=1.91520 (USD)", REACH SVHC=Yes, RoHS=Yes, Schedule B="8531800040, 8531800040|8531800040, 8531800040|8531800040|8531800040, 8531800040|8531800040|8531800040|8531800040", Sensing Method=Magnetic, Shape=Square, SnapEDA_Link=https://www.snapeda.com/parts/CMT-8540S-SMT-TR/CUI%20Devices/view-part/587791/?ref=snap, Stock=8000, Stock 1=66147, Supplier="Arrow Electronics", Supplier 1=Digi-Key, Supplier Part Number=CMT-8540S-SMT-TR, Width=8.5mm
Q500: library part CMP-2000-04929-2, "MOSFET N-CH 60V 115MA SOT23-3", Case/Package=SOT-23, Continuous Drain Current (ID)=115mA, Drain to Source Breakdown Voltage=70V, Drain to Source Resistance=7.5R, Drain to Source Voltage (Vdss)=60V, Gate to Source Voltage (Vgs)=20V, Input Capacitance=50pF, Max Operating Temperature=150°C, Max Power Dissipation=300mW, Min Operating Temperature=-55°C, Package Quantity=3000, Power Dissipation=540mW, Threshold Voltage=2.5V, Contact Plating=Tin, Current Rating=115mA, Dual Supply Voltage=60V, Element Configuration=Single, Fall Time=5.6ns, Height=1mm, Lead Free="Lead Free", Length=2.9mm, Mount="Surface Mount", Nominal Vgs=2.5V, Number of Channels=1, Number of Elements=1, Number of Pins=3, On-State Resistance=7.5R, Packaging="Tape and Reel", Radiation Hardening=No, Rds On Max=7.5R, REACH SVHC="No SVHC", Rise Time=3ns, Termination=SMD/SMT, Turn-Off Delay Time=11ns, Turn-On Delay Time=7ns, Voltage=60V, Voltage Rating (DC)=60V, Weight=0.000282oz, Width=1.3mm
R300 R500 R600 R602: library part CMP-1014-00623-2, "Chip Resistor, 10 KOhm, +/- 1%, 0.25 W, -55 to 155 degC, 1206 (3216 Metric), RoHS, Tape and Reel", Case Code (Imperial)=1206, Case Code (Metric)=3216, Manufacturer=Yageo, Max Operating Temperature=155degC, Min Operating Temperature=-55degC, Package Description="2-Pin Surface Mount Device, Body 3.1 x 1.6 mm", Package Quantity=5000, Package Reference=1206.0, Power Rating=250mW, Resistance=10KOhm, Temperature Coefficient=100ppm/degreesC, Tolerance=1%, Voltage Rating=200V, Case/Package=1206, Composition=ThickFilm, Datasheet URL=http://www.yageo.com/NewPortal/yageodocoutput?fileName=/pdf/R-Chip/PYu-RC_Group_51_RoHS_L_5.pdf, Datasheet Version="Rev. 5, 10/2016", Depth=1.6mm, Height=0.55mm, Lead Free=LeadFree, Length=3.1mm, Manufacturer URL=http://www.yageo.com/, Military Standard=Not, Packaging=TapeandReel, REACH SVHC=Unknown, RoHSCompliant=true, Termination=SMD/SMT, Width=1.6mm
R601: library part CMP-26527-003971-1, "330Ω ±5% 0.25W 1206 Thick Film Chip Resistor AEC-Q200 compliant", Case Code (Imperial)=1206, Case Code (Metric)=3216, Manufacturer="Stackpole Electronics", Max Operating Temperature=155°C, Max Power Dissipation=250mW, Min Operating Temperature=-55°C, Package Height=0.55mm, Package Length=3.2mm, Package Shape=Rectangular, Package Width=1.6mm, Rated Temperature=70°C, Resistance=330R, Resistor Type="Thick Film", Supplier Part Number=RMCF1206JT330RCT-ND, Temperature Coefficient=200ppm/°C, Temperature Coefficient (ppm/Cel)=200, Tolerance=5%, Working Voltage=200V, Case/Package=1206, Category="Chip SMD Resistors", ComponentLink1Description=https://datasheet.ciiva.com:443/pdfs/VipMasterIC/IC/SEIE/SEIE-S-A0009541969/SEIE-S-A0009541969-1.pdf?src-supplier=IHS+Markit, ComponentLink1URL=https://datasheet.ciiva.com:443/pdfs/VipMasterIC/IC/SEIE/SEIE-S-A0009541969/SEIE-S-A0009541969-1.pdf?src-supplier=IHS+Markit, ComponentLink2Description=https://datasheet.ciiva.com/15193/getdatasheetpartid-491989-15193739.pdf?src-supplier=Verical, ComponentLink2URL=https://datasheet.ciiva.com/15193/getdatasheetpartid-491989-15193739.pdf?src-supplier=Verical, Construction=Rectangular, Contact Plating=Tin, Depth=1.6mm, Features="Automotive AEC-Q200", Height=0.028inch, JESD-609 Code=e3, Lead Free="Lead Free", Length=3.2mm, Manufacturer Part Number=RMCF1206JT330R, Military Standard=Not, Mount="Surface Mount", Mounting Technology="Surface Mount", Number of Terminations=2, Packaging="Tape and Reel", Pins=2, Power=250mW, Power Rating=250mW, Pricing="1=0.1, 10=0.026, 50=0.0154, 100=0.0125, 500=0.00808, 1000=0.00685 (USD)", Radiation Hardening=No, Reach SVHC Compliant=Yes, Reference Standard=AEC-Q200, RoHS=Yes, RoHS Compliant=Yes, Series=RMCF, Size Code=1206, Stock=40657, Supplier=Digikey, Technology="METAL GLAZE/THICK FILM", Terminal Finish=Nickel, Termination=Wraparound, Width=0.063inch
U301: "Switch Tactile OFF (ON) SPST Round Button Gull Wing 0.05A 12VDC 1.57N SMD", Case/Package=SMD/SMT, Contact Rating @ Voltage="0.05A @ 12VDC", Current Rating=50mA, Illumination Type, Color=-, Manufacturer=E-Switch, Max Operating Temperature=70°C, Min Operating Temperature=-25°C, Operating Force=160gf, Operating Temperature="-25°C ~ 70°C", Package Quantity=1, Supplier Part Number=EG4906CT-ND, Voltage Rating (DC)=12V, Actuator Height off PCB, from Pins=4.30mm, Actuator Material=-, Actuator Orientation="Top Actuated", Actuator Type=Standard, Category=Switches, Circuit=SPST-NO, ComponentLink1Description=https://datasheet.ciiva.com/2900/n301101-2900856.pdf?src-supplier=Digi-Key, ComponentLink1URL=https://datasheet.ciiva.com/2900/n301101-2900856.pdf?src-supplier=Digi-Key, ComponentLink2Description=https://datasheet.ciiva.com/2900/n301101-2900858.pdf?src-supplier=Digi-Key, ComponentLink2URL=https://datasheet.ciiva.com/2900/n301101-2900858.pdf?src-supplier=Digi-Key, Contact Plating=Silver, Features=-, Illumination=Non-Illuminated, Illumination Type=Non-Illuminated, Illumination Voltage (Nominal)=-, Ingress Protection=-, Manufacturer 1=E-Switch, Manufacturer Part Number=TL3300DF160Q, Manufacturer Part Number 1=TL3300DF160Q, Mechanical Life="200,000 Cycles", Mount="Surface Mount", Mounting Type="Surface Mount", Outline="12.00mm x 12.00mm", Packaging="Cut Tape (CT)", Pricing 1="1=0.60000, 10=0.57800, 25=0.55680, 100=0.48180, 250=0.43896 (USD)", RoHS="RoHS Compliant", RoHS Compliant=Yes, Series=TL3300, Stock 1=57403, Supplier=Digi-Key, Supplier 1=Digi-Key, Supplier Part Number 1=EG4906CT-ND, Switch Function=Off-Mom, Switch Travel=0.35mm, Termination="Gull Wing", Termination Style="Gull Wing", Throw Configuration=SPST
U302: "Bucky Badger Image", Manufacturer Part Number="UW Bucky"
U302: "RP2350 XIAO", Package=None, Check_prices=https://www.snapeda.com/parts/102010428/Seeed+Technology+Co.%252C+Ltd/view-part/?ref=eda, MF="Seeed Technology Co., Ltd", MP=102010428, SnapEDA_Link=https://www.snapeda.com/parts/102010428/Seeed+Technology+Co.%252C+Ltd/view-part/?ref=snap
U400: library part CMP-0395-00503-2, "Single Output LDO, 1 A, Fixed 3.3 V Output, 2 to 5.5 V Input, 4-pin SOT-223 (DCY), -40 to 125 degC, Green (RoHS & no Sb/Br)", Manufacturer="Texas Instruments", Accuracy(%)=2, Code_JEDEC=TO-261, ComponentLink1Description="Manufacturer URL", ComponentLink1URL=http://www.ti.com/, ComponentLink2Description=Datasheet, ComponentLink2URL=http://www.ti.com/general/docs/lit/getliterature.tsp?genericPartNumber=TLV1117LV33&fileType=pdf, ComponentLink3Description="Package Specification", ComponentLink3URL=http://www.ti.com/litv/pdf/mpds094a, DatasheetVersion=SBVS160A, Eco-Plan="Green (RoHS & no Sb/Br)", Fixed Output Options(V)=3.3, Iout(Max)(A)=1, Iq(Typ)(mA)=0.05, Mounting Technology="Surface Mount", PackageDescription="4-Pin Plastic Small Outline, Body 3.5 x 6.5 mm, Pitch 2.3 mm", PackageReference=DCY0004A, PackageVersion=4202506/B, PartNumber=TLV1117LV33DCYR, SubFamily="Single Channel LDO", Vdo(Typ)(mV)=1200, Vin(Max)(V)=5.5, Vin(Min)(V)=2, Vout Adj(Max)(V)=3.3, Vout Adj(Min)(V)=3.3
U600: "Pwr Sply Func; Voltage Detector, Voltage Supervisor; SOT-23; VS 1 to 5.5V; IS 10uA", Case/Package=SOT-23, Manufacturer=Microchip, Manufacturer Part Number=MCP1316T-29LE/OT, Max Operating Temperature=125°C, Max Output current=10mA, Max Power Dissipation=240mW, Max Reset Threshold Voltage=2.944V, Max Supply Current=10µA, Max Supply Voltage=5.5V, Min Operating Temperature=-40°C, Min Reset Threshold Voltage=2.857V, Min Supply Voltage=1V, Number of Voltages Monitored=1, Quiescent Current=1µA, Threshold Voltage=2.9V, Category="Voltage Supervisors", ComponentLink1Description=https://datasheet.octopart.com:443/MCP1316T-29LE/OT-Microchip-datasheet-11051608.pdf?src-supplier=Electro+Sonic, ComponentLink1URL=https://datasheet.octopart.com:443/MCP1316T-29LE/OT-Microchip-datasheet-11051608.pdf?src-supplier=Electro+Sonic, ComponentLink2Description=https://datasheet.octopart.com:443/MCP1316T-29LE-OT-Microchip-datasheet-160583330.pdf?src-supplier=Microchip, ComponentLink2URL=https://datasheet.octopart.com:443/MCP1316T-29LE-OT-Microchip-datasheet-160583330.pdf?src-supplier=Microchip, ComponentLink3Description=https://datasheet.octopart.com:443/MCP1316T-29LE/OT-Microchip-datasheet-12520420.pdf?src-supplier=Microchip+SCT, ComponentLink3URL=https://datasheet.octopart.com:443/MCP1316T-29LE/OT-Microchip-datasheet-12520420.pdf?src-supplier=Microchip+SCT, ComponentLink4Description=https://datasheet.octopart.com:443/MCP1316T-29LE/OT-Microchip-datasheet-609017.pdf?src-supplier=Newark, ComponentLink4URL=https://datasheet.octopart.com:443/MCP1316T-29LE/OT-Microchip-datasheet-609017.pdf?src-supplier=Newark, ComponentLink5Description=https://datasheet.octopart.com:443/MCP1316T-29LE/OT-Microchip-datasheet-30575.pdf?src-supplier=Mouser, ComponentLink5URL=https://datasheet.octopart.com:443/MCP1316T-29LE/OT-Microchip-datasheet-30575.pdf?src-supplier=Mouser, ComponentLink6Description=https://datasheet.octopart.com:443/MCP1316T-29LE-OT-Microchip-datasheet-158592061.pdf?src-supplier=SHENGYU+ELECTRONICS, ComponentLink6URL=https://datasheet.octopart.com:443/MCP1316T-29LE-OT-Microchip-datasheet-158592061.pdf?src-supplier=SHENGYU+ELECTRONICS, ComponentLink7Description=https://datasheet.octopart.com:443/MCP1316T-29LE/OT-Microchip-datasheet-9601151.pdf?src-supplier=RS+(Formerly+Allied+Electronics), ComponentLink7URL=https://datasheet.octopart.com:443/MCP1316T-29LE/OT-Microchip-datasheet-9601151.pdf?src-supplier=RS+(Formerly+Allied+Electronics), ComponentLink8Description=http://sigma.octopart.com:80/188449423/materials_sheet/Microchip-MCP1316T-29LE-OT.pdf?src-supplier=Compliance+Statements, ComponentLink8URL=http://sigma.octopart.com:80/188449423/materials_sheet/Microchip-MCP1316T-29LE-OT.pdf?src-supplier=Compliance+Statements, ComponentLink9Description=http://sigma.octopart.com:80/rohs_statement/Microchip-company-71.pdf?src-supplier=Compliance+Statements, ComponentLink9URL=http://sigma.octopart.com:80/rohs_statement/Microchip-company-71.pdf?src-supplier=Compliance+Statements, ComponentLink10Description=http://sigma.octopart.com:80/reach_statement/Microchip-company-70.pdf?src-supplier=Compliance+Statements, ComponentLink10URL=http://sigma.octopart.com:80/reach_statement/Microchip-company-70.pdf?src-supplier=Compliance+Statements, ComponentLink11Description=http://sigma.octopart.com:80/conflict_mineral_statement/Microchip-company-69.pdf?src-supplier=Compliance+Statements, ComponentLink11URL=http://sigma.octopart.com:80/conflict_mineral_statement/Microchip-company-69.pdf?src-supplier=Compliance+Statements, ComponentLink12Description=http://sigma.octopart.com:80/conflict_mineral_statement/Microchip-company-68.pdf?src-supplier=Compliance+Statements, ComponentLink12URL=http://sigma.octopart.com:80/conflict_mineral_statement/Microchip-company-68.pdf?src-supplier=Compliance+Statements, Country of Assembly="Malaysia, Thailand", Country of Fabrication="United States of America", Country of Origin="Malaysia, Thailand", Drawn By="Adam Shebani", Export Control Classification Number (ECCN) Code=EAR99, Harmonized Tariff Schedule (HTS) Code=8542.39.0060, Height=1.2954mm, Introduction Date=2005-11-18, Length=3.0988mm, Lifecycle Status=Production, Mounting Technology="Surface Mount", Nominal Supply Current=10µA, Number of Channels=1, Number of Elements=1, Operating Supply Current=10µA, Overvoltage Threshold=2.944V, Packaging="Cut Tape", Pins=5, Power Dissipation=240mW, Pricing="1=0.8561, 10=0.8476, 25=0.6945, 100=0.694, 250=0.6935, 500=0.693, 1000=0.6925 (USD)", Projected EOL Date=2034-11-18, Radiation Hardening=No, REACH SVHC=No, Reset="Active Low", Reset Timeout=140ms, RoHS=Compliant, Schedule B="8542390000, 8542390000|8542390000|8542390000|8542390000|8542390000", Stock=1723, Supplier="Arrow Electronics", Supplier Part Number=MCP1316T-29LE/OT, Termination=SMD/SMT, Type="Simple Reset/Power-On Reset", Undervoltage Threshold=2.857V, Watchdog Timer=Yes, Width=1.8034mm

## Via types
v1: diameter 1.27, hole 0.711, Top Layer to Bottom Layer, 112 vias

## Nets (pads, with @x,y where several pads share a name; then routed paths per layer and width w, separated by ;. In a path a pad name is that pad's centre, name@x,y a point inside that pad or via, vN(x,y) a via of type N, cw(c..) or ccw(c..) an arc to the next point about the centre after c; other vN are vias at no path point)
3.3V: 3.3V.1 C401.1 D500.1 LS500.P R300.2 R600.2 R602.2 U400.2 U400.4 U600.5
5.0V: 5.0V.1 C200.1 C201.1 C202.1 C203.1 C204.1 C205.1 C206.1 C207.1 C208.1 C209.1 C210.1 C211.1 C400.1 LED200.1 LED201.1 LED202.1 LED203.1 LED204.1 LED205.1 LED206.1 LED207.1 LED208.1 LED209.1 LED210.1 LED211.1 U302.14 U400.3 | length 0.2
  Top Layer w0.254: U400.3@5.076,25.749 U400.3
BTN: R300.1 TP302.1 U301.3 U301.4 U302.7 | length 137.4
  Top Layer w0.254: v1(1.75,29) v1(24.889,29) ; v1(1.872,75.38) U302.7 ; v1(24.889,4.971) 24.918,5 U301.3 40.529,5.029 54.471,5.029 U301.4 60,5 R300.1
  Bottom Layer w0.254: v1(1.75,29) 1.811,29.061 1.811,75.319 v1(1.872,75.38) ; v1(24.889,4.971) 24.889,20.465 24.914,20.491 24.914,21.332 24.889,21.358 v1(24.889,29)
BUZZER: Q500.1 R500.2 TP500.1 U302.6 | length 93
  Top Layer w0.254: v1(3.826,78.007) 6.94,78.007 U302.6 ; v1(3.954,67.157) 3.982,67.185 23.09,67.185 v1(23.118,67.213) ; Q500.1 21.95,13.55 23.025,14.625 R500.2 ; v1(23.168,21.093) 23.168,18.143 R500.2 ; TP500.1 R500.2
  Bottom Layer w0.254: v1(3.826,78.007) 3.89,77.943 3.89,67.221 v1(3.954,67.157) ; v1(23.118,67.213) 23.143,67.187 23.143,21.118 v1(23.168,21.093)
"BUZZER Q": D500.2 LS500.N Q500.3 | length 21.5
  Top Layer w0.254: LS500.N 13.529,10.971 16.41,10.971 16.559,10.822 16.559,9.27 16.708,9.121 21,9.121 ; Q500.3 21,9.121 ; D500.2@27.787,12.437 25.314,12.437 25.093,12.217 25.093,9.27 24.944,9.121 21,9.121
CLK0: CLK0.1 LED200.5 U302.9 | length 41.2
  Top Layer w0.254: U302.9 23.366,78.059 v1(31.067,78.059) 47.263,78.059 47.538,77.784 47.538,74.998 LED200.5 ; v1(30.777,87.532) 34.968,87.532 CLK0.1
  Bottom Layer w0.254: v1(30.777,87.532) 30.906,87.403 30.906,78.22 v1(31.067,78.059)
CLK1: LED200.2 LED201.5 | length 35.3
  Top Layer w0.254: LED200.2 47.47,70.01 47.47,67.702 47.619,67.553 v1(53.479,67.553) ; v1@53.66,75.592 64.62,75.592 v1(64.707,75.679) ; LED201.5 61.515,71.566 62.31,71.566 62.415,71.672 v1(64.849,71.672)
  Bottom Layer w0.254: v1(53.479,67.553) 53.572,67.646 v1(53.572,75.504) ; v1(64.707,75.679) 64.849,75.536 v1(64.849,71.672)
CLK2: LED201.2 LED202.5 | length 32.4
  Top Layer w0.254: LED201.2 59.809,68.059 77.531,68.059 v1(77.679,67.911) ; LED202.5 71.493,61.442 72.04,61.442 72.091,61.493 77.703,61.493 v1(77.725,61.471)
  Bottom Layer w0.254: v1(77.679,67.911) 77.702,67.888 77.702,61.494 v1(77.725,61.471)
CLK3: LED202.2 LED203.5 | length 36.6
  Top Layer w0.254: v1(65.052,57.417) 65.323,57.417 66.676,58.77 LED202.2 ; v1(65.108,52.43) 65.171,52.492 81.928,52.492 v1(81.991,52.555) ; LED203.5 74.967,47.507 v1(82.054,47.507)
  Bottom Layer w0.254: v1(65.052,57.417) 65.08,57.388 65.08,52.458 v1(65.108,52.43) ; v1(81.991,52.555) 82.022,52.524 82.022,47.539 v1(82.054,47.507)
CLK4: LED203.2 LED204.5 | length 54.5
  Top Layer w0.254: v1(67.545,47.53) 70.01,47.53 LED203.2 ; v1(67.545,50.86) 67.608,50.923 85.095,50.923 v1(85.158,50.987) ; LED204.5 71.922,33.779 72.092,33.949 84.719,33.949 85.029,34.259 v1(85.304,34.259)
  Bottom Layer w0.254: v1(67.545,47.53) v1(67.545,50.86) ; v1(85.158,50.987) 85.231,50.914 85.231,34.332 v1(85.304,34.259)
CLK5: LED204.2 LED205.5 | length 22
  Top Layer w0.254: LED205.5 61.23,23.646 62.355,22.52 65.076,22.52 65.311,22.756 68.128,22.756 v1(68.307,22.577) ; LED204.2 68.228,35.031 v1(68.228,33.448)
  Bottom Layer w0.254: v1(68.228,33.448) 68.267,33.409 68.267,22.617 v1(68.307,22.577)
CLK6: LED205.2 LED206.5 | length 26.2
  Top Layer w0.254: LED206.5 47.539,20.001 47.539,17.596 47.701,17.434 v1(55.47,17.434) ; v1(55.415,29.166) 55.507,29.257 57.566,29.257 58.77,28.053 LED205.2
  Bottom Layer w0.254: v1(55.415,29.166) 55.442,29.138 55.442,17.462 v1(55.47,17.434)
CLK7: LED206.2 LED207.5 | length 33.1
  Top Layer w0.254: v1(31.403,21.623) 31.674,21.623 LED207.5 ; v1(31.508,18.265) 31.586,18.343 42.164,18.343 v1(42.242,18.422) ; v1(42.155,26.86) 47.351,26.86 47.5,26.711 LED206.2
  Bottom Layer w0.254: v1(31.403,21.623) 31.455,21.571 31.455,18.317 v1(31.508,18.265) ; v1(42.155,26.86) 42.198,26.816 42.198,18.465 v1(42.242,18.422)
CLK8: LED207.2 LED208.5 | length 33.1
  Top Layer w0.254: v1(16.963,34.574) 17.238,34.574 17.752,34.061 22.865,34.061 23.069,33.856 LED208.5 ; v1(17.027,30.765) 17.044,30.748 26.817,30.748 26.825,30.757 36.318,30.757 36.467,30.608 36.467,28.79 36.442,28.765 36.442,28.192 LED207.2
  Bottom Layer w0.254: v1(16.963,34.574) 16.963,34.299 16.995,34.267 16.995,30.797 v1(17.027,30.765)
CLK9: LED208.2 LED209.5 | length 36.1
  Top Layer w0.254: v1(12.891,47.401) 19.941,47.401 LED209.5 ; v1(12.909,43.693) 13.054,43.548 29.674,43.548 v1(29.792,43.43) ; LED208.2 28.238,36.144 29.665,37.571 v1(29.792,37.571)
  Bottom Layer w0.254: v1(12.891,47.401) 12.9,47.392 12.9,43.702 v1(12.909,43.693) ; v1(29.792,37.571) v1(29.792,43.43)
CLK10: LED209.2 LED210.5 | length 61.5
  Top Layer w0.254: v1(9.463,40.755) 9.54,40.677 26.155,40.677 v1(26.232,40.6) ; v1(9.485,61.479) 9.559,61.404 23.544,61.404 LED210.5 ; LED209.2 25.283,47.177 27.105,47.177 v1(27.15,47.132)
  Bottom Layer w0.254: v1(9.463,40.755) 9.474,40.766 9.474,61.468 v1(9.485,61.479) ; v1(26.232,40.6) 27.509,41.877 27.509,46.146 27.345,46.311 27.345,46.938 v1(27.15,47.132)
CLK11: LED210.2 LED211.5 | length 50.2
  Top Layer w0.254: v1(18.284,64.764) 18.347,64.827 33.759,64.827 v1(33.822,64.89) ; v1(18.298,70.763) 25.126,70.763 27.364,73.001 32.339,73.001 33.77,71.57 LED211.5 ; LED210.2 28.192,58.558 31.063,58.558 31.723,59.218 31.955,59.218 32.187,59.45 33.16,59.45 v1(33.812,60.102)
  Bottom Layer w0.254: v1(18.284,64.764) 18.291,64.771 18.291,70.756 v1(18.298,70.763) ; v1(33.812,60.102) 33.817,60.107 33.817,64.885 v1(33.822,64.89)
DATA0: DATA0.1 LED200.4 U302.11 | length 42.2
  Top Layer w0.254: U302.11 23.327,82.9 v1(39.106,82.9) 39.112,82.906 49.043,82.906 v1(49.049,82.912) ; v1(38.996,87.62) 39.056,87.56 42.44,87.56 DATA0.1 ; LED200.4 49.105,74.965 v1(49.105,77.174)
  Bottom Layer w0.254: v1(38.996,87.62) 39.051,87.565 39.051,82.955 v1(39.106,82.9) ; v1(49.049,82.912) 49.077,82.884 49.077,77.202 v1(49.105,77.174)
DATA1: LED200.3 LED201.4 | length 13.7
  Top Layer w0.254: LED200.3 61.872,70.04 62.313,70.481 LED201.4
DATA2: LED201.3 LED202.4 | length 26.2
  Top Layer w0.254: LED201.3 60.216,66.28 75.741,66.28 v1@75.781,66.24 ; LED202.4 72.093,59.832 75.749,59.832 v1(75.929,59.652)
  Bottom Layer w0.254: v1(75.929,59.652) 75.977,59.701 75.977,66.192 v1(76.025,66.24)
DATA3: LED202.3 LED203.4 | length 28.9
  Top Layer w0.254: LED202.3 67.873,57.438 80.019,57.438 v1@80.066,57.391 ; LED203.4 75.011,45.849 v1(80.049,45.849)
  Bottom Layer w0.254: v1(80.049,45.849) 80.057,45.858 80.057,57.382 v1@80.066,57.391
  other v1: 80.049,57.391
DATA4: LED203.3 LED204.4 | length 32.9
  Top Layer w0.254: LED203.3 69.982,45.842 69.982,42.4 70.131,42.251 v1(79.935,42.251) ; LED204.4@70.499,32.367 70.531,32.335 v1(79.96,32.335)
  Bottom Layer w0.254: v1@79.948,42.239 79.948,32.347 v1(79.96,32.335)
DATA5: LED204.3 LED205.4 | length 22.7
  Top Layer w0.254: LED205.4 59.844,22.846 62.619,20.071 v1(66.427,20.071) ; LED204.3 66.345,34.728 66.345,32.245 v1(66.369,32.221)
  Bottom Layer w0.254: v1(66.369,32.221) 66.398,32.192 66.398,20.1 v1(66.427,20.071)
DATA6: LED205.3 LED206.4 | length 22.9
  Top Layer w0.254: v1(45.472,17.792) 45.577,17.897 45.577,19.717 LED206.4 ; v1(53.685,19.021) 53.763,19.099 53.763,27.009 53.986,27.232 57.332,27.232 LED205.3
  Bottom Layer w0.254: v1(45.472,17.792) 45.591,17.792 46.273,18.475 52.864,18.475 53.41,19.021 v1(53.685,19.021)
DATA7: LED206.3 LED207.4 | length 13.7
  Top Layer w0.254: LED207.4 32.687,24.519 33.128,24.96 LED206.3
DATA8: LED207.3 LED208.4 | length 36.3
  Top Layer w0.254: v1(19.626,35.883) 22.196,35.883 22.806,35.273 LED208.4 ; v1(19.629,23.656) 19.684,23.601 30.229,23.601 v1(30.284,23.546) ; v1(30.265,28.766) 30.308,28.723 34.787,28.723 LED207.3
  Bottom Layer w0.254: v1(19.626,35.883) v1(19.626,35.883) 19.628,23.657 v1(19.629,23.656) ; v1(30.265,28.766) 30.274,28.756 30.274,23.556 v1(30.284,23.546)
DATA9: LED208.3 LED209.4 | length 28.3
  Top Layer w0.254: v1(15.248,49.04) 19.98,49.04 LED209.4 ; v1(15.269,37.521) 15.272,37.518 27.082,37.518 LED208.3@27.18,37.616
  Bottom Layer w0.254: v1(15.248,49.04) 15.259,49.03 15.259,37.531 v1(15.269,37.521)
DATA10: LED209.3 LED210.4 | length 37.7
  Top Layer w0.254: v1(15.025,62.953) 15.213,62.764 24.37,62.764 LED210.4 ; v1(15.152,55.098) 27.181,55.098 v1(27.284,54.995) ; LED209.3@24.971,49.111 25.125,49.265 v1(27.105,49.265)
  Bottom Layer w0.254: v1(15.025,62.953) 15.088,62.889 15.088,55.161 v1(15.152,55.098) ; v1(27.105,49.265) 27.195,49.354 27.195,54.906 v1(27.284,54.995)
DATA11: LED210.3 LED211.4 | length 29.6
  Top Layer w0.254: v1(27.833,74.659) 32.651,74.659 35.156,72.154 LED211.4 ; v1(28.021,66.758) 28.092,66.828 31.658,66.828 v1(31.729,66.899) ; LED210.3 29.249,60.156 29.59,60.496 31.225,60.496 31.7,60.972 v1(31.882,60.972)
  Bottom Layer w0.254: v1(27.833,74.659) 27.927,74.565 27.927,66.852 v1(28.021,66.758) ; v1(31.729,66.899) 31.805,66.823 31.805,61.048 v1(31.882,60.972)
GND: C200.2 C201.2 C202.2 C203.2 C204.2 C205.2 C206.2 C207.2 C208.2 C209.2 C210.2 C211.2 C400.2 C401.2 GND.1 LED200.6 LED201.6 LED202.6 LED203.6 LED204.6 LED205.6 LED206.6 LED207.6 LED208.6 LED209.6 LED210.6 LED211.6 Q500.2 R500.1 R601.2 U301.1 U301.2 U302.13 U400.1 U600.2 | length 107.5
  Top Layer w0.254: C400.2 8.215,31.015 v1(12.135,31.015) ; U400.1 9.941,25.766 v1(13.204,25.766) ; C401.2 10.542,15.042 v1(13.332,15.042) ; v1(15.054,32.596) 15.178,32.472 24.432,32.472 LED208.6@24.449,32.454 ; v1(16.1,17.405) 19.477,17.405 19.975,17.903 R500.1 ; v1(17.254,45.855) 19.995,45.855 LED209.6 ; v1(17.636,13.497) 20.047,13.497 Q500.2 ; v1(19.876,59.861) 19.917,59.903 22.861,59.903 LED210.6 ; U302.13@23.227,88.08 v1(27.681,88.08) ; v1(28.478,39.989) 28.548,39.919 31.464,39.919 C208.2 ; v1(29.485,69.716) 29.638,69.87 31.773,69.87 LED211.6 ; C209.2 30.013,48.987 v1(32.211,48.987) ; C210.2 33.499,57.549 34.682,56.366 v1(34.94,56.366) ; v1(34.781,33.354) 34.975,33.16 37.386,33.16 C207.2 ; LED207.6 35.217,22.981 37.965,22.981 v1(38.003,22.942) ; v1(37.169,10.109) 40.391,10.109 U301.1 ; C211.2 40.428,63.026 42.245,63.026 v1(42.424,62.847) ; v1(43.123,74.935) 45.875,74.935 LED200.6 ; v1(43.546,30.044) 45.956,30.044 C206.2 ; C200.2 49.033,65 49.098,64.934 v1(51.321,64.934) ; LED206.6 49.105,20.045 v1(51.603,20.045) ; v1(51.999,31.796) v1(51.999,31.796) 54.75,31.796 C205.2 ; U301.2 54.564,9.936 v1(57.414,9.936) ; v1(56.926,72.062) 56.966,72.022 59.785,72.022 LED201.6 ; C201.2 57.617,61.974 60.856,61.974 v1(60.988,61.842) ; v1(59.379,36.769) 61.223,36.769 C204.2 ; LED205.6 63.027,24.519 64.471,25.962 v1(64.485,25.962) ; C202.2 63.475,55.021 66.628,55.021 v1(66.797,54.851) ; C203.2 65.028,45.972 66.463,45.972 67.28,45.155 v1(67.493,45.155) ; v1(68.18,12.549) 70.851,12.549 R601.2 ; LED202.6@70.546,62.681 71.223,63.357 v1(73.217,63.357) ; LED204.6@72.106,35.131 73.07,36.095 v1(74.932,36.095) ; LED203.6 74.98,49.12 v1(77.83,49.12) ; v1(79.473,9.971) 79.487,9.985 81.66,9.985 U600.2
MR: R600.1 U600.3 | length 9.4
  Top Layer w0.254: R600.1 74.253,7.272 81.526,7.272 81.675,7.421 U600.3
WDI: R602.1 U600.4 | length 5.3
  Top Layer w0.254: U600.4 84.245,8.97 84.245,7.58 84.394,7.431 86.181,7.431 87.225,8.475 R602.1
XRES: D600.2 U600.1 | length 38.8
  Top Layer w0.254: v1(68.317,4.154) 68.327,4.144 81.609,4.144 v1(81.619,4.134) ; v1(68.347,9.206) 68.622,9.206 68.991,9.575 76.328,9.575 76.477,9.426 76.477,9.373 76.9,8.95 D600.2 ; U600.1 81.684,10.959 v1(81.684,13.178)
  Bottom Layer w0.254: v1(68.317,4.154) 68.332,4.169 68.332,9.191 v1(68.347,9.206) ; v1(81.619,4.134) 81.652,4.167 81.652,13.146 v1(81.684,13.178)
XRES_N_R: D600.1 R601.1 | length 4.5
  Top Layer w0.254: R601.1 74.169,12.431 74.169,10.993 74.318,10.844 76.794,10.844 D600.1
pads on no net: LED211.2 LED211.3 LS500.M1 LS500.M2 U302.1 U302.2 U302.3 U302.4 U302.5 U302.8 U302.10 U302.12

## Polygon pours and split planes (outlines as drawn)
3.3V on Top Layer "TOP_LAYER_3.3V_P010" (solid, remove dead copper, pour order 10): 0.04,0 0.268,0.228 0.268,24.586 6.278,24.586 6.23,24.634 6.23,27.299 8.739,27.299 8.745,27.292 8.745,24.34 17.481,24.34 17.59,24.231 17.59,15.985 94.695,15.985 95,15.68 95,0 0,0
5.0V on Top Layer "TOP_LAYER_5.0V_P012" (solid, remove dead copper, pour order 12): 0.268,24.586 6.181,24.586 6.23,24.634 6.23,27.299 8.739,27.299 8.745,27.292 8.745,24.34 17.481,24.34 17.59,24.231 17.59,15.985 94.695,15.985 94.848,15.832 95,15.985 95,95 0,95 0,24.827
GND on Bottom Layer "BOTTOM_LAYER_GND_P003" (solid, remove dead copper, pour order 3): 0,95 0,0 95,0 95,95

## Keep-outs
Keep-Out Layer:
  lines w0.254: -0.127,0 ccw(c0,0) 0,-0.127 ; -0.127,0 ccw(c0,0) 0,-0.127 ; -0.127,0 -0.127,95 ; -0.127,95 cw(c0,95) 0,95.127 ; -0.127,95 cw(c0,95) 0,95.127 ; 0,-0.127 95,-0.127 ; 0,95.127 95,95.127 ; 95,-0.127 ccw(c95,0) 95.127,0 ; 95,-0.127 ccw(c95,0) 95.127,0 ; 95,95.127 cw(c95,95) 95.127,95 ; 95,95.127 cw(c95,95) 95.127,95 ; 95.127,0 95.127,95 ; 0.127,0.127 0.127,94.873 94.873,94.873 94.873,0.127 0.127,0.127

## Other copper
Top Layer:
  text "Adam Shebani" at 71.155,91.982 h2
  text "Section 001" at 73.752,88.474 h2

## Silkscreen, mask and mechanical layers (free items; w line width, h text height)
Mechanical 1:
  text "Adam Shebani" at 19.939,103.124 h5
Mechanical 2:
  lines w0.254: 10.586,0 95,0 95,95 10.586,95 10.586,0

## Dimensions
95,95 to 95,0 on Mechanical 1
0,118.803 to 95,116.964 on Mechanical 1

## Text inside footprints (layer, text, board x,y; h text height)
LED200: Mechanical 1 "Adam Shebani" at 39.38,66.205 h1.52
LED201: Mechanical 1 "Adam Shebani" at 49.821,67.759 h1.52 r330
LED202: Mechanical 1 "Adam Shebani" at 59.64,63.885 h1.52 r300
LED203: Mechanical 1 "Adam Shebani" at 66.206,55.62 h1.52 r270
LED204: Mechanical 1 "Adam Shebani" at 67.757,45.187 h1.52 r240.02
LED205: Mechanical 1 "Adam Shebani" at 63.885,35.36 h1.52 r210
LED206: Mechanical 1 "Adam Shebani" at 55.62,28.794 h1.52 r180
LED207: Mechanical 1 "Adam Shebani" at 45.179,27.241 h1.52 r150
LED208: Mechanical 1 "Adam Shebani" at 35.197,30.737 h1.52 r117.7
LED209: Mechanical 1 "Adam Shebani" at 28.794,39.38 h1.52 r90
LED210: Mechanical 1 "Adam Shebani" at 27.241,49.821 h1.52 r60
LED211: Mechanical 1 "Adam Shebani" at 31.115,59.64 h1.52 r30
LS500: Mechanical 1 "Adam Shebani" at 1.027,-0.628 h1.52; Top Overlay "+" at 15.055,1.54 h1.52; Top Overlay "-" at 15.081,11.83 h1.52
U302: Top Overlay "ECE 315" at 42,36 h3; Top Overlay "UW-Madison" at 40.5,39 h3
U600: Mechanical 1 "Adam Shebani" at 77.701,6.711 h1